# Altium PCB UC-425.PcbDoc (part 2 of 2)
Units mil, origin at the board's own origin, x right, y up, seen from the top; angles counter-clockwise.
Board outline 1574.8 x 1574.8 mil, 4 copper layers (Top Layer, MidLayer1, GND, Bottom Layer); 88 components, 85 nets, 465 pads, 244 vias.
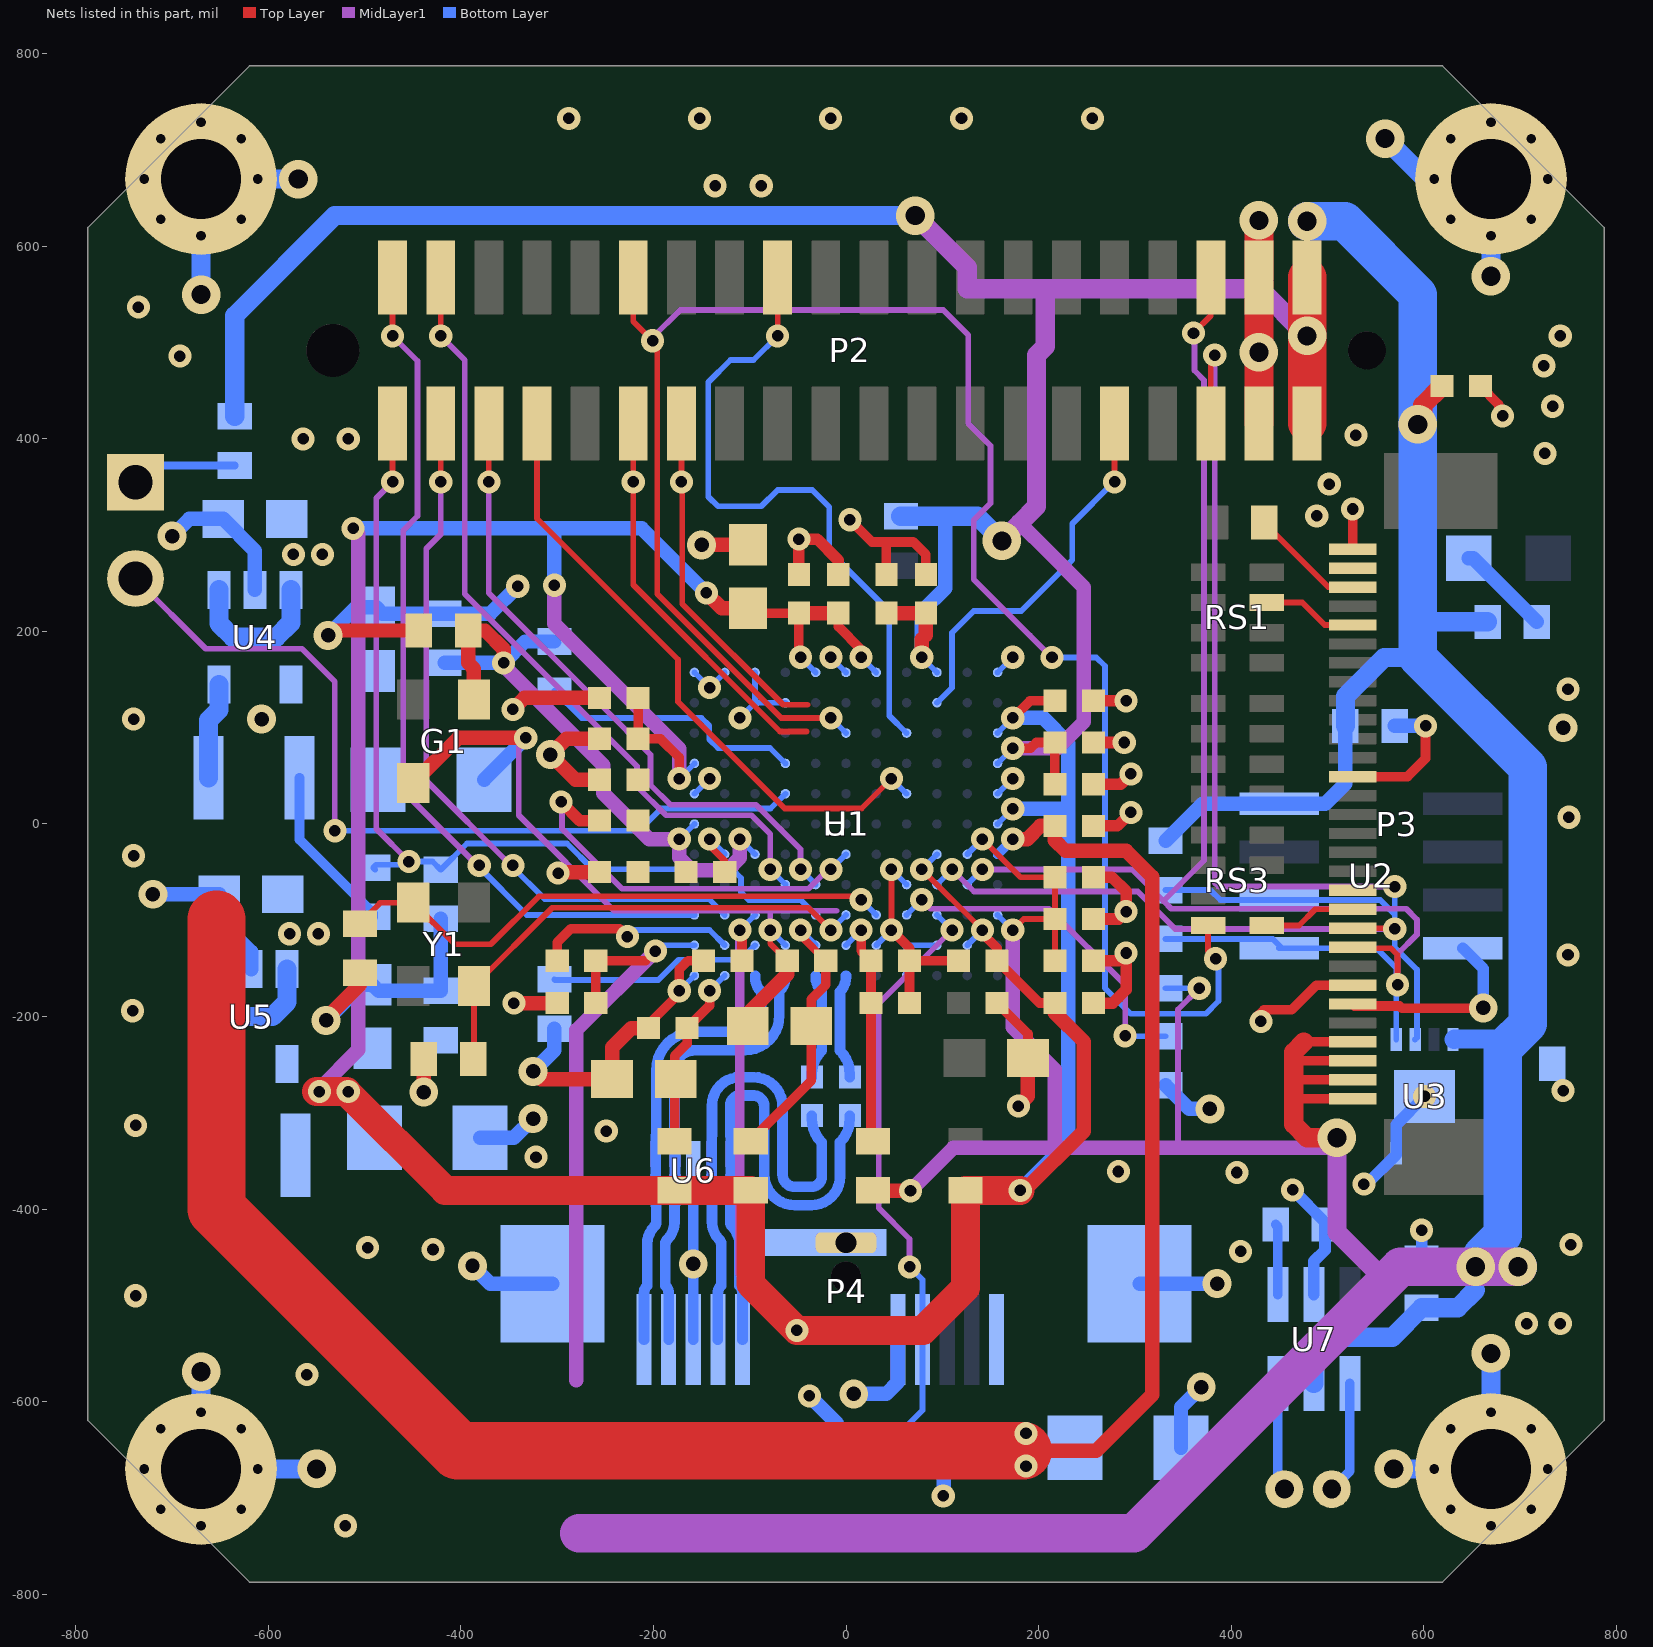
[diagram p4: the nets of this part, all layers, seen from the top]

## Via types
v1: diameter 24, hole 12, Top Layer to Bottom Layer, tented both sides, 207 vias
v2: diameter 40, hole 20, Top Layer to Bottom Layer, tented both sides, 18 vias
v3: diameter 30, hole 15, Top Layer to Bottom Layer, tented both sides, 18 vias
v4: diameter 24, hole 12, Top Layer to Bottom Layer, tented top, 1 vias

## Nets (pads, with @x,y where several pads share a name; then routed paths per layer and width w, separated by ;. In a path a pad name is that pad's centre, name@x,y a point inside that pad or via, vN(x,y) a via of type N, cw(c..) or ccw(c..) an arc to the next point about the centre after c; other vN are vias at no path point) (continued)
FX3_DQ13: P2.10 U1.K9 | length 396
  Top Layer w6: v1(279,355.43) P2.10@279,416.21
  Bottom Layer w6: U1.K9@94.47,125.96 110,141.49 110,198.56 132.64,221.2 182.09,221.2 235,274.11 235,312 278.43,355.43 v1(279,355.43)
FX3_DQ14: P2.23 U1.J8 | length 684
  Top Layer w6: v1(-71,507) P2.23@-71,567.79
  Bottom Layer w6: v1(-71,507) -96,482 -120,482 -143,459 -143,340 -133,330 -88,330 -71,347 -35,347 -17.37,329.37 -17.37,283.37 45,221 45,112.45 U1.J8@62.98,94.47
FX3_DQ15: P2.34 U1.G8 | length 656.1
  Top Layer w6: P2.34@-321,416.21 -321,355.43 -321,317.33 -174.56,170.89 -174.56,127 -63.56,16 16,16 v1(47.23,47.23) v1@44.03,47.23
  Bottom Layer w6: v1(47.23,47.23) U1.G8@62.98,31.49
FX3_I2S_SCL: P2.6 P3.21 R5.1 U1.D9 U2.6 U3.6 | length 1809.7
  Top Layer w6: P2.6@379,452 P2.6@379,416.21 379,483 v1(383,487) ; P3.21@526.23,-108.27 v1@569.27,-108.27
  MidLayer1 w6: v1(110.21,-47.24) 132.98,-70 303,-70 342,-109 v1(570,-109) ; v1(383,487) 383,-16 383,-61 387,-65 v1(570,-65)
  Bottom Layer w6: U1.D9@94.47,-62.98 v1(110.21,-47.24) ; R5.1@332,-68.59 375.59,-68.59 ; 379,-69 389,-79 U2.6@449.91,-79 555,-79 570,-94 ; v1(570,-65) 570,-94 ; U3.6@591.16,-223.94 593,-222.1 593,-151.23 570,-128.23 v1(570,-109) 570,-94
FX3_I2S_SDA: P2.5 P3.22 R4.1 U1.D10 U2.5 U3.5 | length 1686.9
  Top Layer w6: v1(361,510) 379,528 P2.5@379,567.79 P2.5@379,537 ; P3.22@526.23,-127.95 527.28,-129 566,-129 573,-136 v1(573,-167)
  MidLayer1 w6: v1(141.7,-47.24) 297.01,-47.24 329.89,-80.11 ; v1@362,509 362,471 372,461 372,-38 329.89,-80.11 ; v1(573,-167) 573,-135 593,-115 593,-99.23 581.91,-88.14 337.92,-88.14 329.89,-80.11
  Bottom Layer w6: U1.D10@125.96,-62.98 v1(141.7,-47.24) ; R4.1@332,-119.41 443.41,-119.41 U2.5@453,-129 ; U2.5@449.91,-129 U2.5@453,-129 ; U3.5@571.47,-223.94 v1@571.47,-168.53 ; v1@571.47,-167 571.47,-149.47 551,-129 U2.5@453,-129
FX3_PCLK: P2.29 RS3.4 U1.J6 | length 1999.2
  Top Layer w6: P2.29@-221,567.79 -221,522 v1(-200.96,501.96) ; v1@-196,497 -196,239 -67.22,110.21 v1(-15.75,110.21) ; v1@376.16,-132.16 RS3.4@376.16,-105.4
  MidLayer1 w6: v1(-200.96,501.96) -200.96,505.32 -172.28,534 78,534 ; 82,534 78,534 ; 191,195.7 142.85,243.85 ; v1(214,173) 213.7,173 142.85,243.85 ; 78,534 101,534 127,508 127,416 150,393 150,333.18 132.7,315.88 132.7,254 142.85,243.85
  Bottom Layer w6: v1(-15.75,110.21) U1.J6@0,94.47 ; v1(214,173) 260,173 269,164 269,-170.5 295.5,-197 374,-197 387,-184 387,-143 v1(384,-140)
FX3_RESET: C5.2 P2.40 R6.2 U1.C5 | length 995.6
  Top Layer w6: v1(-471,355.43) P2.40@-471,416.21
  MidLayer1 w6: v1(-471,355.43) -488,338.43 -488,-5 v1(-454,-39)
  Bottom Layer w6: R6.2@-489,-47.41 R6.2@-491,-45.41 -488,-42.41 -457.41,-42.41 v1(-454,-39) -429.41,-39 C5.2@-421,-47.41 -393.8,-20.21 -289.8,-20.21 -263,-47 -118,-47 -109,-56 -109,-71 -101,-79 -46.96,-79 U1.C5@-31.49,-94.47
FX3_SPI-MISO_UART-TX: P2.38 U1.C2 | length 745.2
  Top Layer w6: v1(-421,355.43) P2.38@-421,416.21
  MidLayer1 w6: v1(-421,355.43) -421,301 -436,286 -436,45 v1@-348.5,-42.5
  Bottom Layer w6: v1@-348.5,-42.5 -313,-78 -142.43,-78 U1.C2@-125.96,-94.47
  other v1: -346,-43
FX3_SPI-MOSI_UART-RX: P2.36 U1.D5 | length 671.9
  Top Layer w6: v1(-371,355.43) P2.36@-371,416.21
  MidLayer1 w6: v1(-371,355.43) -371,240 -253.5,122.5 -203,72 -203,40.56 -182.44,20 -93.56,20 -47.24,-26.32 v1(-47.24,-47.24)
  Bottom Layer w6: v1(-47.24,-47.24) U1.D5@-31.49,-62.98
FX3_SPI-SCK_UART-RTS: P2.37 U1.D4 | length 831.1
  Top Layer w6: v1(-421,507) P2.37@-421,567.79
  MidLayer1 w6: v1(-421,507) -396,482 -396,239 -217,60 -217,39 -187,9 -98.11,9 -78.73,-10.39 v1(-78.73,-47.24)
  Bottom Layer w6: v1(-78.73,-47.24) U1.D4@-62.98,-62.98
FX3_SPI-SSN_UART-CTS: P2.39 U1.C1 | length 927.5
  Top Layer w6: v1(-471,507) P2.39@-471,567.79
  MidLayer1 w6: v1(-471,507) -445,481 -445,320 -460,305 -460,265 ; -460,286 -460,265 ; v1@-382,-44 -460,34 -460,265
  Bottom Layer w6: v1@-382,-44 -331.53,-94.47 U1.C1@-157.45,-94.47
  other v1: -381,-43
GND: C1.1 C2.1 C3.2 C4.1 C5.1 C6.2 C7.1 C8.2 C9.2 C10.2 C11.1 C12.2 C13.1 C14.1 C15.2 C16.2 C17.2 C18.2 C19.2 C20.2 C21.1 C22.1 C23.1 C24.2 C25.2 C26.2 C27.2 C28.2 C29.2 C30.2 C31.2 C32.2 C33.2 C36.1 C37.2 C38.2 C39.2 C40.2 C41.2 C42.2 C43.2 C44.2 C45.2 C46.2 C47.2 C48.1 C49.1 CT1.2 CT2.2 CT3.2 G1.2 H1.0 P2.3 P2.4 P2.28 P2.30 P3.1 P3.13 P3.24 P3.25 P4.5 P4.8 P4.11 P4.12 P4.13 R7.2 R8.2 R9.2 U1.A1 U1.A8 U1.B2 U1.B4 U1.B7 U1.B8 U1.B9 U1.D8 U1.E2 U1.E6 U1.G1 U1.G11 U1.K3 U1.K4 U1.L1 U1.L2 U1.L3 U1.L6 U1.L11 U2.4 U3.4 U4.2 U5.2 U6.3 U6.8 U7.2 | length 7917.1
  Top Layer w6: P2.30@-221,416.21 v1(-221,355.43) -221,248.44 -68.56,96 -54,96 -41,96 ; v1(-171,355.43) P2.28@-171,416.21 ; -170,329 -170,318 ; v1@-170,354.43 -170,318 ; v1(-78.73,-110.22) -78.73,-124.28 C26.2@-61,-142 ; -40,123.81 -45,123.81 -65.26,123.81 -170,228.56 -170,318 ; v1(47.23,-110.22) v1(47.23,-47.24)
  Top Layer w7: v1(-141.71,-15.75) -141.71,-22.3 -126,-38 C31.2@-126,-50
  Top Layer w10: C18.2@-300,-142 -300,-123 -286,-109 -235.15,-109 v1(-227.15,-117) ; C25.2@-205,-212 -205,-208 -173.2,-176.2 v1(-173.2,-173.2) -173.2,-151.2 -164,-142 C40.2@-148,-142 ; v1(4,316) 27,293 36,293 42,293 ; C19.2@42,259 42,293 ; v1(47.23,-110.22) 66,-128.98 C10.2@66,-142 ; C9.2@66,-186 C10.2@66,-142 ; C32.2@83,259 83,280 70,293 42,293 ; C43.2@117,-142 C10.2@66,-142 ; C24.2@157,-186 189,-218 C21.1@189,-243 ; v1@426,-201 434,-193 463,-193 488.68,-167.32 P3.24@526.23,-167.32 ; P3.25@526.23,-187.01 528.22,-189 575,-189 577.55,-191.55 v3@657.45,-191.55 ; P3.13@526.23,49.21 583.21,49.21 602,68 v1(602,102) ; P3.1@526.23,285.43 v1(526.23,327.23) ; C20.2@659,455 678,436 v1@678,423
  Top Layer w12: v1(-296,23) -276.5,3.5 C15.2@-256,3.5 ; C37.2@-49,259 v1(-49,296) -30,296 -8,274 C41.2@-8,259 ; C44.2@257,-186 277,-186 291,-172 v1(291,-134) 283,-142 C42.2@257,-142 ; C16.2@257,-98.67 283.33,-98.67 v1(291,-91) 291,-70 276.33,-55.33 C27.2@257,-55.33 ; C47.2@257,-2 282,-2 v1(296,12) ; C29.2@257,41.33 285.33,41.33 v1(296,52) ; C17.2@257,84.67 v1(289,84.67) ; C38.2@257,128 v1(291,128)
  Top Layer w15: v3@-541,-203 -505,-167 C1.1@-505,-154.59 ; v3(-538,196) -533,201 C3.2@-443.59,201 ; G1.2@-449.5,42.69 -402.82,89.37 v1(-332.63,89.37) ; v3(-438.59,-278.59) C2.1@-438.59,-244 ; v1(-345,-186) C45.2@-300,-186 ; v1@-345,120 -334,131 C39.2@-256,131 ; v3(-325,-257) -317,-265 C22.1@-243,-265 ; v3@-308.5,73.5 v3(-307,72) ; -308,-265 C22.1@-243,-265 ; v1@-298,-50 C28.2@-256,-50 ; C30.2@-256,46 -281,46 v3(-307,72) ; C46.2@-256,88.5 -290.5,88.5 v3(-307,72) ; C25.2@-205,-212 -223,-212 -243,-232 C22.1@-243,-265 ; v3(-150,290) C36.1@-102,290 ; C23.1@-102,-210 -102,-197 -61,-156 C26.2@-61,-142 ; v1(179,-293) 189,-283 C21.1@189,-243
  Top Layer w30: P2.4@429,416.21 v2(429,490) P2.3@429,562 ; P2.3@429,567.79 v2(429,627)
  MidLayer1 w6: v1(-332.63,89.37) -340,82 -340,9 -241,-90 -78.73,-90 ; v1@-295,23 -295,-4.89 -232.65,-67.24 -38.95,-67.24 -18.95,-47.24 v1(-15.75,-47.24) ; v1(-78.73,-110.22) -78.73,-90 ; -10,-90 -78.73,-90
  Bottom Layer w6: v1@-220.15,-110 -141.92,-110 U1.B2@-125.96,-125.96 ; v1(-173.2,-173.2) U1.A1@-157.45,-157.45 ; U1.G1@-157.45,31.49 v1(-141.71,47.23) ; U1.L1@-157.45,157.45 v1(-141.71,141.7) U1.L2@-125.96,157.45 ; v1(-141.71,-15.75) U1.E2@-125.96,-31.49 ; v1(-110.22,110.21) U1.K3@-94.47,125.96 ; U1.L3@-94.47,157.45 U1.K3@-94.47,125.96 ; v1(-78.73,-110.22) U1.B4@-62.98,-125.96 ; U1.K4@-62.98,125.96 U1.K3@-94.47,125.96 ; v1(-15.75,-47.24) U1.E6@0,-31.49 ; v1(-15.75,173.19) U1.L6@0,157.45 ; U1.B7@31.49,-125.96 v1(47.23,-110.22) U1.B8@62.98,-125.96 ; v1(47.23,-47.24) U1.D8@62.98,-62.98 ; U1.A8@62.98,-157.45 U1.B8@62.98,-125.96 ; U1.B9@94.47,-125.96 U1.B8@62.98,-125.96 ; U1.G11@157.45,31.49 v1(173.19,47.23) ; U1.L11@157.45,157.45 v1(173.19,173.19)
  Bottom Layer w11: P4.8@-158.66,-535.55 -158.66,-463 U6.3@-158.66,-372.75
  Bottom Layer w12: v1(464,-380) 497.59,-413.59 C49.1@497.59,-416 497.59,-442.76 486,-454.35 U7.2@486,-488.74 ; v1@541,-374.02 571.47,-343.54 U3.4@571.47,-342.06 571.47,-312.53 v4(601,-283) ; C48.1@598,-451.41 v1(598,-422) ; U2.4@640.86,-129 662,-150.14 v3(662,-191) ; v3@657.45,-191.55 v3@657.45,-191
  Bottom Layer w15: v3(-720,-73) C13.1@-651,-73 -651,-99.68 -618,-132.68 U5.2@-618,-150.79 ; v3(-700,299) -682,317 C11.1@-647,317 -614,284 U4.2@-614,243.21 ; v3(-540,-204) -503,-167 C14.1@-492,-167 -485.59,-173.41 C12.2@-421,-173.41 C5.1@-421,-98.59 ; v3(-538,196) -509,225 C7.1@-488,225 -481.59,218.59 C8.2@-417,218.59 -369.41,218.59 v1(-341,247) ; v3(-388,-459) -369.52,-477.48 P4.12@-304.92,-477.48 ; CT3.2@-380,-326 -345,-326 v3(-325,-306) ; CT2.2@-376,46 v1(-332.63,89.37) ; v3(-325,-257) -303,-235 R9.2@-303,-212.59 ; v1(-38,-594) -9.59,-622.41 R7.2@-9.59,-647 ; v3(8,-592) 42,-592 53.94,-580.06 P4.5@53.94,-535.55 ; v1@101.41,-698 C33.2@101.41,-648 ; P4.11@304.92,-477.48 v3(385.52,-477.48) ; R8.2@332,-271.59 356.41,-296 v3(378,-296) ; CT1.2@348,-648 348,-606 v3(369,-585) ; C4.1@569.98,102 v1(602,102)
  Bottom Layer w20: v2(-670,-569) H1.0@-670,-670 v2(-550,-670) ; v2(-670,550) H1.0@-670,670 v2(-569,670) ; v2(560,712) 602,670 H1.0@670,670 v2(670,569) ; v2(569,-670) H1.0@670,-670 v2(670,-550)
  other v1: -520,-729 101,-698 -560,-572 707,-519 742,-519 -738,-490 410,-444 -429,-442 -497,-440 753,-437 538,-374.02 406,-362 283,-361 -322,-346 -249,-319 -738,-313 745,-277 431,-205 -741,-194 750,-136 -299,-51 -740,-33 751,7 -740,109 -346,119 750,140 489,320 502,353 726,385 -564,400 -517,400 529.7,403.97 682,424 734,434 725,476 -692,486 742,507 -735,537 -136,663 -88,663 -288,733 -152,733 -16,733 120,733 256,733
  other v3: -158.66,-457 745,100
LIV_IO: P3.5 RS1.7 | length 98.8
  Top Layer w6: RS1.7@437.16,230.1 473.9,230.1 497.31,206.69 P3.5@526.23,206.69
NetC9_1: C9.1 C10.1 L1.1 U1.B6 | length 246.5
  Top Layer w10: v1(15.74,-110.22) 15.74,-131.75 C10.1@26,-142 C9.1@26,-186 26,-327.41 L1.1@28,-329.41
  Bottom Layer w6: U1.B6@0,-125.96 v1(15.74,-110.22)
NetC49_2: C49.2 U7.1 | length 73.6
  Bottom Layer w10: C49.2@446.41,-416 448.6,-418.19 U7.1@448.6,-488.74
NetIR_1: IR.1 U7.4 | length 117.5
  Bottom Layer w10: IR.1@504.61,-691 523.4,-672.2 U7.4@523.4,-581.26
NetIR_2: IR.2 U7.6 | length 112.6
  Bottom Layer w10: U7.6@448.6,-581.26 448.6,-684.2 IR.2@455.39,-691
NetL2_1: L2.1 U4.5 | length 101.3
  Bottom Layer w20: L2.1@-662.24,48 -662.24,107.76 -651.4,118.6 U4.5@-651.4,144.79
NetL6_1: L6.1 U5.5 | length 99.3
  Bottom Layer w20: L6.1@-666.24,-344 -666.24,-286.24 -655.4,-275.4 U5.5@-655.4,-249.21
NetP1_1: P1.1 R1.1 | length 110.2
  Bottom Layer w8: P1.1@-738,355 -720.59,372.41 R1.1@-635,372.41
NetP1_2: P1.2 U1.G4 | length 890.3
  MidLayer1 w6: P1.2@-738,255 -665,182 -565,182 -531,148 v1(-531,-7)
  Bottom Layer w6: v1(-531,-7) -353,-7 -349,-7 -215,-7 -192,16 -78.47,16 U1.G4@-62.98,31.49
NetR2_1: R2.1 U1.H4 | length 279.5
  Bottom Layer w6: R2.1@-303,138.41 -274.59,110 -150,110 -142,102 -142,88 -133,79 -79,79 U1.H4@-62.98,62.98
NetR8_1: R8.1 U1.C8 | length 365.3
  MidLayer1 w6: v1(78.72,-78.73) 88,-88 211,-88 290,-167 v1(290,-220)
  Bottom Layer w6: U1.C8@62.98,-94.47 v1(78.72,-78.73) ; v1(290,-220) 290.41,-220.41 R8.1@332,-220.41
NetR9_1: R9.1 U1.B3 | length 223.7
  Bottom Layer w6: R9.1@-303,-161.41 -302.41,-162 -195,-162 -174,-141 -109.51,-141 U1.B3@-94.47,-125.96
NetR10_1: R10.1 V1.1 | length 98.3
  Bottom Layer w15: V1.1@646.66,276 651.59,276 R10.1@717.59,210
OTG_ID: P4.4 R7.1 U1.C9 | length 625.2
  MidLayer1 w6: v1(66,-460) 66,-431 34,-399 34,-186.43 v1(110.21,-110.22)
  Bottom Layer w6: R7.1@41.59,-647 79.53,-609.06 P4.4@79.53,-535.55 79.53,-473.53 v1(66,-460) ; U1.C9@94.47,-94.47 v1(110.21,-110.22)
PCK_IO: P3.20 RS3.5 | length 96
  Top Layer w6: RS3.5@437.16,-105.4 470.6,-105.4 487.42,-88.58 P3.20@526.23,-88.58
RXVDDQ: C22.2 C25.1 L4.2 U1.A2 | length 193.5
  Top Layer w10: L4.2@-178,-329.41 -178,-241 -165,-228 C25.1@-165,-212 -141.71,-188.71 v1(-141.71,-173.2)
  Bottom Layer w6: v1(-141.71,-173.2) U1.A2@-125.96,-157.45
SSRX_N: P4.9 U1.A4 U6.4 U6.7 | length 467.8
  Bottom Layer w11: P4.9@-184.25,-535.55 -184.25,-487.47 ccw(c-195.5,-487.47) -187.55,-479.51 -187.55,-436.22 cw(c-180.78,-436.22) -185.56,-431.43 ccw(c-203.44,-413.56) -178.16,-413.56 -178.16,-396.5 ccw(c-179.37,-395.29) -177.66,-395.29 U6.4@-177.66,-377 U6.7@-177.66,-343 -177.66,-324.71 ccw(c-179.37,-324.71) -178.16,-323.5 -178.16,-256.16 cw(c-157,-256.16) -157,-235 -105.23,-235 ccw(c-105.23,-199) -69.23,-199 -69.23,-174.12 ccw(c-84.3,-159.04) -62.98,-159.04 U1.A4@-62.98,-157.45
SSRX_P: P4.10 U1.A3 U6.5 U6.6 | length 467.8
  Bottom Layer w11: P4.10@-209.84,-535.55 -209.84,-487.47 cw(c-198.59,-487.47) -206.55,-479.51 -206.55,-436.22 cw(c-180.78,-436.22) -199,-418 ccw(c-203.44,-413.56) -197.16,-413.56 -197.16,-396.5 cw(c-195.95,-395.29) -197.66,-395.29 U6.5@-197.66,-377 U6.6@-197.66,-343 -197.66,-324.71 cw(c-195.95,-324.71) -197.16,-323.5 -197.16,-256.16 cw(c-157,-256.16) -157,-216 -105.23,-216 ccw(c-105.23,-199) -88.23,-199 -88.23,-174.12 cw(c-73.15,-159.04) -94.47,-159.04 U1.A3@-94.47,-157.45
SST_N: C35.2 U1.A6 | length 110
  Bottom Layer w11: U1.A6@0,-157.45 0,-159.04 cw(c-21.32,-159.04) -6.25,-174.12 -6.25,-235.26 cw(c-30.98,-259.99) 4,-259.99 C35.2@4,-263
SST_P: C34.2 U1.A5 | length 110
  Bottom Layer w11: C34.2@-35.49,-263 -35.49,-259.99 cw(c-0.51,-259.99) -25.25,-235.25 -25.25,-174.12 cw(c-10.17,-159.04) -31.49,-159.04 U1.A5@-31.49,-157.45
SSTX_N: C35.1 P4.6 U6.1 U6.10 | length 545.3
  Bottom Layer w11: P4.6@-107.48,-535.55 -107.48,-487.47 ccw(c-118.73,-487.47) -110.78,-479.51 -110.78,-436.22 ccw(c-136.54,-436.22) -118.32,-418 cw(c-113.88,-413.56) -120.16,-413.56 -120.16,-396.5 ccw(c-121.37,-395.29) -119.66,-395.29 U6.1@-119.66,-377 U6.10@-119.66,-343 -119.66,-324.71 ccw(c-121.37,-324.71) -120.16,-323.5 -120.16,-292.16 cw(c-110,-292.16) -110,-282 -96,-282 cw(c-96,-293) -85,-293 -85,-364 ccw(c-53,-364) -53,-396 -36,-396 ccw(c-36,-366.25) -6.25,-366.25 -6.25,-330.75 ccw(c-30.98,-306.01) 4,-306.01 C35.1@4,-303
SSTX_P: C34.1 P4.7 U6.2 U6.9 | length 545.3
  Bottom Layer w11: P4.7@-133.07,-535.55 -133.07,-487.47 cw(c-121.82,-487.47) -129.78,-479.51 -129.78,-436.22 ccw(c-136.54,-436.22) -131.76,-431.43 cw(c-113.88,-413.56) -139.16,-413.56 -139.16,-396.5 cw(c-137.95,-395.29) -139.66,-395.29 U6.2@-139.66,-377 U6.9@-139.66,-343 -139.66,-324.71 cw(c-137.95,-324.71) -139.16,-323.5 -139.16,-292.16 cw(c-110,-292.16) -110,-263 -96,-263 cw(c-96,-293) -66,-293 -66,-364 ccw(c-53,-364) -53,-377 -36,-377 ccw(c-36,-366.25) -25.25,-366.25 -25.25,-330.75 cw(c-0.51,-306.01) -35.49,-306.01 C34.1@-35.49,-303
STB_IO: P3.2
TIGG_IO: P3.3 R11.1 | length 119.7
  Top Layer w6: R11.1@434.59,313 434.59,312.41 500.94,246.06 P3.3@526.23,246.06
TXVDDQ: C23.2 C26.1 L5.2 U1.B5 | length 284.6
  Top Layer w6: v1@-47.24,-115.77 v1(-47.24,-110.22)
  Top Layer w8: v1@-47.24,-115.77 C26.1@-21,-142
  Top Layer w10: L5.2@-99,-329.41 -36,-266.41 C23.2@-36,-210 -36,-182 -21,-167 C26.1@-21,-142
  Bottom Layer w6: v1(-47.24,-110.22) U1.B5@-31.49,-125.96
VCC(+3.3V): C3.1 C4.2 C6.1 C7.2 C8.1 C15.1 C16.1 C17.1 C18.1 C19.1 C20.1 C27.1 C28.1 C29.1 C30.1 C31.1 C32.1 C42.1 C45.1 C48.2 CT2.1 G1.4 L1.2 L2.2 P2.1 P2.2 P3.27 P3.28 P3.29 P3.30 R1.2 R2.2 R3.1 R4.2 R5.2 R6.1 R10.2 U1.B1 U1.C11 U1.E3 U1.E10 U1.F1 U1.H11 U1.L9 U2.8 U3.8 U4.4 U7.5 | length 8903.5
  Top Layer w6: v1(141.7,-15.75) 181.29,-55.33 C27.1@217,-55.33 C16.1@217,-98.67 ; v1(173.19,-110.22) 184.74,-98.67 C16.1@217,-98.67 ; C17.1@212.94,88.72 C17.1@217,84.67 ; C42.1@217,-142 C16.1@217,-98.67
  Top Layer w10: C45.1@-260,-186 C18.1@-260,-142 -208,-142 ; v1(173.19,78.72) 191.72,78.72 197.67,84.67 C17.1@217,84.67 C29.1@217,41.33 ; 465,-285.43 P3.30@526.23,-285.43 ; 465,-265.75 P3.29@526.23,-265.75 ; 465,-246.06 P3.28@526.23,-246.06 ; 482,-226.38 P3.27@526.23,-226.38
  Top Layer w15: G1.4@-386.5,129.31 -386.5,161.32 -392.59,167.41 -392.41,167.59 C3.1@-392.41,201 -375,201 -355.59,181.59 v1(-355.59,167.41) ; L1.2@28,-380.59 28.41,-381 v1(67,-381) ; C19.1@42,219 C32.1@83,219 83,196 ; v1(78.72,173.19) 78.72,191.72
  Top Layer w20: 475.62,-226.38 465,-237 465,-246.06 465,-265.75 465,-285.43 465,-312 479,-326 v2(510,-326) ; v2@594,412 597,412 599,414 599,435 C20.1@619,455
  Top Layer w40: P2.2@479,416.21 v2(479,507) P2.1@479,567.79
  MidLayer1 w6: 345,-336.5 345,-192.59 v1(367,-170.59) v1@363.91,-170.59
  MidLayer1 w15: v1@-357,166 -252,61 -252,32 -204.26,-15.75 v1(-173.2,-15.75) -173.2,-34.81 -160,-48 -123,-48 -110.22,-35.22 v1(-110.22,-15.75) ; -280,-578 -280,-214 v1(-198,-132) ; v1(67,-381) 111.5,-336.5 217,-336.5 ; v1(173.19,-110.22) 173.19,-211.2 217,-255 217,-336.5 ; v1(173.19,78.72) 219.72,78.72 247,106 247,246 211.5,281.5 180.5,312.5 ; v2(510,-326) 499.5,-336.5 345,-336.5 217,-336.5
  MidLayer1 w20: v2(72,632) 126,578 126,556 207,556 ; v2(162,294) 180.5,312.5 198,330 198,487 207,496 207,556 ; v2(479,507) 430,556 207,556 ; v2(510,-326) 510,-424.13 560.93,-475.07
  MidLayer1 w40: -277,-737 299,-737 560.93,-475.07 576,-460 v2@652,-460 ; v2@660,-460 v2(698,-460)
  Bottom Layer w6: v1@-191.96,-125.96 U1.B1@-157.45,-125.96 ; v1(-173.2,-15.75) U1.F1@-157.45,0 ; v1(-110.22,-15.75) U1.E3@-94.47,-31.49 ; v1(78.72,173.19) U1.L9@94.47,157.45 ; U1.E10@125.96,-31.49 v1(141.7,-15.75) ; U1.C11@157.45,-94.47 v1(173.19,-110.22) ; U1.H11@157.45,62.98 v1(173.19,78.72) ; R4.2@332,-170.59 v1(367,-170.59)
  Bottom Layer w10: L2.2@-567.76,48 -567.76,-16.24 -491,-93 R6.1@-491,-96.59
  Bottom Layer w15: C8.1@-417,167.41 v1(-355.59,167.41) -333.41,189.59 R2.2@-303,189.59 ; v1(78.72,173.19) 78.72,220.72 103,245 103,319.59 ; R5.2@332,-17.41 370.41,21 U2.8@449.91,21 498,21 518.8,41.8 C4.2@518.8,102
  Bottom Layer w20: R1.2@-635,423.59 -635,528 -531,632 v2(72,632) ; R3.1@57,319.59 103,319.59 136.41,319.59 v2(162,294) ; U7.5@486,-581.26 486,-547 499.97,-533.03 567.56,-533.03 C48.2@598,-502.59 635.41,-502.59 654,-484 ; C4.2@518.8,102 518.8,132.8 559,173 594,173 ; 595,210 R10.2@666.41,210 ; U3.8@631.75,-223.94 632.28,-223.41 672,-223.41
  Bottom Layer w40: v2(479,626) 518,626 594,550 594,412 594,173 708,59 708,-207.74 682.41,-233.33 C6.1@682.41,-249 682.41,-426.59 v2@661,-448
  other v2: 654,-460 594,415
  other v3: -607,109
VCC(+5V): C11.2 C13.2 C33.1 C47.1 CT1.1 P4.1 U1.E11 U4.1 U4.3 U5.1 U5.3 | length 2435.6
  Top Layer w6: C47.1@213.26,-5.75 C47.1@217,-2
  Top Layer w15: v1(173.19,-15.75) 188.25,-15.75 202,-2 C47.1@217,-2 217,-17 228,-28 291,-28 318,-55 318,-593 260,-651 208,-651
  Top Layer w60: -654,-99 -654,-400 -403,-651 184,-651
  Bottom Layer w10: U1.E11@157.45,-31.49 v1(173.19,-15.75)
  Bottom Layer w20: U5.1@-655.4,-150.79 -655.4,-185.6 -641,-200 -595.78,-200 -580.6,-184.82 U5.3@-580.6,-150.79 ; U4.1@-651.4,243.21 -651.4,208.4 -637,194 -591.78,194 -576.6,209.18 U4.3@-576.6,243.21
  other v1: 187,-667 187,-633 -578,-114 -548,-114 -574,280 -544,280
VDD(+1.2V): C12.1 C14.2 C36.2 C37.1 C38.1 C39.1 C40.1 C41.1 C43.1 C44.1 C46.1 CT3.1 L3.1 L4.1 L5.1 L6.2 U1.B10 U1.C3 U1.E9 U1.F11 U1.H1 U1.J11 U1.L5 U1.L7 U5.4 | length 4475.1
  Top Layer w6: v1(78.72,-47.24) v1(141.7,-110.22) v1@137,-105.51 ; C38.1@209.22,120.21 C38.1@217,128
  Top Layer w10: C39.1@-216,131 C46.1@-216,88.5 -192.5,88.5 -173.2,69.19 v1(-173.2,47.23) ; C40.1@-108,-142 v1@-108,-112.43 ; C36.2@-102,224 -97,219 C37.1@-49,219 -49,174.96 v1(-47.24,173.19) ; C41.1@-8,219 -8,205 15.74,181.25 v1(15.74,173.19) ; v1@139.96,-111.96 157,-129 C43.1@157,-142 201,-186 C44.1@217,-186 ; v1(173.19,110.21) 190.98,128 C38.1@217,128
  Top Layer w15: v1(-145,240) -129,224 C36.2@-102,224 ; C37.1@-49,219 C41.1@-8,219 ; v1(181,-380.59) 185.41,-380.59 247,-319 247,-226 217,-196 C44.1@217,-186
  Top Layer w30: v1@-550,-278 v1(-547,-278) -519,-278 -416.41,-380.59 L4.1@-178,-380.59 L5.1@-99,-380.59 -99,-478 v1(-51,-526) 55,-526 80,-526 124,-482 L3.1@124,-380.59 v1(181,-380.59)
  MidLayer1 w10: v1(-110.22,-110.22) -110.22,-466.79 v1(-51,-526)
  MidLayer1 w15: v1@-550,-278 -537.5,-265.5 ; -517,-245 -537.5,-265.5 ; v1(-512,307) -506.5,301.5 -506.5,-234.5 -537.5,-265.5 ; v1(-303,248) -303,208 -173.2,78.19 v1(-173.2,47.23)
  Bottom Layer w6: v1(-173.2,47.23) U1.H1@-157.45,62.98 ; v1(-110.22,-110.22) U1.C3@-94.47,-94.47 ; v1(-47.24,173.19) U1.L5@-31.49,157.45 ; v1(15.74,173.19) U1.L7@31.49,157.45 ; v1(78.72,-47.24) U1.E9@94.47,-31.49 ; U1.B10@125.96,-125.96 v1(141.7,-110.22) ; U1.F11@157.45,0 v1(173.19,15.74) ; U1.J11@157.45,94.47 v1(173.19,110.21)
  Bottom Layer w15: v1(-512,307) -303,307 ; v1@-303,256 -303,307 ; v1(-145,240) -212,307 -303,307 ; v1(173.19,15.74) 228,15.74 ; v1(173.19,110.21) 204.78,110.21 231,84 231,-330.59 v1(181,-380.59)
  other v1: -517,-278
XCK_IO: P3.19
XTAL_IN: C2.2 U1.C6 Y1.1 | length 512.4
  Top Layer w6: C2.2@-387.41,-244 -386.5,-243.09 Y1.1@-386.5,-168.31 -305.2,-87 -38.96,-87 v1(-15.75,-110.22)
  Bottom Layer w6: v1(-15.75,-110.22) U1.C6@0,-94.47
XTAL_OUT: C1.2 U1.C7 Y1.2 | length 592.6
  Top Layer w6: C1.2@-505,-103.41 -484,-82.41 -484,-81.69 Y1.2@-449.5,-81.69 -406.19,-125 -369,-125 -319,-75 12.02,-75 v1(15.74,-78.73)
  Bottom Layer w6: v1(15.74,-78.73) U1.C7@31.49,-94.47
pads on no net: G1.1 P2.0 P3.31 P4.14 RS3.3 RS3.6 U1.A11 U1.B11 U1.C4 U1.C10 U1.D1 U1.D2 U1.D3 U1.D7 U1.D11 U1.E1 U1.E4 U1.E5 U1.E7 U1.E8 U1.F2 U1.F3 U1.F4 U1.F5 U1.F6 U1.G2 U1.G3 U1.H2 U1.H3 U1.H6 U1.J1 U1.J2 U1.J3 U1.J4 U1.K1 U1.K2 U1.K5 U1.L4 U2.1 U2.2 U2.3 U2.7 U3.1 U3.2 U3.3 U3.7 U7.3 Y1.3 Y1.4

## Polygon pours and split planes (outlines as drawn)
GND on Bottom Layer "GND_L02_P1001" (solid, remove dead copper, shelved, pour order 1005): -790.83,-649.85 cw(c-788,-647) -792.02,-647 -792.02,647 cw(c-788,647) -790.83,649.85 -790.84,649.84 -650.44,790.24 -650.45,790.23 cw(c-647.6,787.4) -647.6,791.42 647.6,791.42 cw(c647.6,787.4) 650.45,790.23 650.44,790.24 790.24,650.44 790.23,650.45 cw(c787.4,647.6) 791.42,647.6 791.42,-647.6 cw(c787.4,-647.6) 790.23,-650.45 790.24,-650.44 650.44,-790.24 650.45,-790.23 cw(c647.6,-787.4) 647.6,-791.42 -647.6,-791.42 cw(c-647.6,-787.4) -650.45,-790.23 -650.44,-790.24
GND on Top Layer "GND_L02_P1001" (solid, remove dead copper, shelved, pour order 1004): -790.83,-649.85 cw(c-788,-647) -792.02,-647 -792.02,647 cw(c-788,647) -790.83,649.85 -790.84,649.84 -650.44,790.24 -650.45,790.23 cw(c-647.6,787.4) -647.6,791.42 647.6,791.42 cw(c647.6,787.4) 650.45,790.23 650.44,790.24 790.24,650.44 790.23,650.45 cw(c787.4,647.6) 791.42,647.6 791.42,-647.6 cw(c787.4,-647.6) 790.23,-650.45 790.24,-650.44 650.44,-790.24 650.45,-790.23 cw(c647.6,-787.4) 647.6,-791.42 -647.6,-791.42 cw(c-647.6,-787.4) -650.45,-790.23 -650.44,-790.24
GND on MidLayer1 "GND_L02_P1001" (solid, remove dead copper, shelved, pour order 1003): -790.83,-649.85 cw(c-788,-647) -792.02,-647 -792.02,647 cw(c-788,647) -790.83,649.85 -790.84,649.84 -650.44,790.24 -650.45,790.23 cw(c-647.6,787.4) -647.6,791.42 647.6,791.42 cw(c647.6,787.4) 650.45,790.23 650.44,790.24 790.24,650.44 790.23,650.45 cw(c787.4,647.6) 791.42,647.6 791.42,-647.6 cw(c787.4,-647.6) 790.23,-650.45 790.24,-650.44 650.44,-790.24 650.45,-790.23 cw(c647.6,-787.4) 647.6,-791.42 -647.6,-791.42 cw(c-647.6,-787.4) -650.45,-790.23 -650.44,-790.24
GND on GND (split plane): 643.67,735 604,735 604,604 735,604 735,643.67 767.3,611.36 767.3,-611.36 735,-643.67 735,-605 604,-605 604,-736 642.67,-736 611.36,-767.3 -611.36,-767.3 -642.67,-736 -605,-736 -605,-605 -736,-605 -736,-642.67 -767.3,-611.36 -767.3,611.36 -736,642.67 -736,604 -605,604 -605,735 -643.67,735 -611.36,767.3 611.36,767.3

## Keep-outs
Keep-Out Layer:
  the board outline again, w8

## Other copper
Top Layer:
  rectangle net VCC(+5V): -678,-137 -627,299
  rectangle net VCC(+5V): -678,258 -530,303
  rectangle net VCC(+5V): -685,-137 -538,-82
  rectangle net VCC(+3.3V): -223,-61 -163,12
  rectangle net VCC(+3.3V): -226,-55 -207,53
  pour cut-out: -62,-238 -62,-327.41 26,-327.41 26,-238
  pour cut-out: 554,-158 555,-159 555,-196 497,-196 496,-197 491.63,-192.63 491.63,-160.89 551.11,-160.89
MidLayer1:
  rectangle net VCC(+3.3V): -681,93 -543.13,138
  rectangle net VCC(+3.3V): -684.87,-528 -635.87,138
  rectangle net VCC(+3.3V): -488,-757 -253,-496
  rectangle net VCC(+3.3V): -685,-534 -258,-496
  pour cut-out: -62,-238 -62,-327.41 26,-327.41 26,-238
Bottom Layer:
  rectangle net VCC(+3.3V): -615,17 -472,170
  rectangle net VCC(+5V): -596,-180 -537,-91
  rectangle net VCC(+5V): -607,-126 -552,-51
  rectangle net VDD(+1.2V): -500,-236 -405,-213
  rectangle net VCC(+3.3V): -496,156 -401,179
  rectangle net VCC(+5V): -588,226 -530,336
  rectangle net VDD(+1.2V): -584,-377 -473,-230
  rectangle net VCC(+5V): 151,-681 245,-618
  rectangle net VCC(+5V): 150,-665 172,-490
  rectangle net VCC(+3.3V): 630,-483 723,-414
  pour cut-out: -62,-238 -62,-327.41 26,-327.41 26,-238
GND (plane layer: these items are gaps in the copper):
  region: 735,-605 604,-605 604,-736 735,-736
  region: 735,735 604,735 604,604 735,604
  region: -605,735 -736,735 -736,604 -605,604
  region: -605,-605 -736,-605 -736,-736 -605,-736
  rectangle: -62,-327.41 26,-238
  lines w15: -645.67,-787.4 645.67,-787.4

## Silkscreen, mask and mechanical layers (free items; w line width, h text height)
Top Overlay:
  lines w8: 184,-211 185,-210 185,-195 ; 196,-189 190,-195 185,-195 ; 282,-251 241,-251 185,-195
Bottom Overlay:
  text "®" at -380,695 h100
  text "Arducam" at 383.46,610 h200
  text "UC-425" at 173,494 h120
  text "Rev.C" at 129,387 h120
Mechanical 1:
  the board outline again, w8
Mechanical 2:
  circle w7.78: c-1.24,-455 r31.24
  text "这是孔，不是MASK点" at -179,-546 h55

## Text inside footprints (layer, text, board x,y; h text height)
P3: Top Overlay "30" at 485.67,-329.65 h60 r90; Top Overlay "1" at 488,344 h60 r90
P4: Mechanical 16 "1" at 150.86,-405.96 h55; Mechanical 16 "6" at -112.92,-405.96 h55; Mechanical 16 "9" at -189.69,-405.96 h55; Mechanical 16 "2" at 125.27,-405.96 h55; Mechanical 16 "3" at 99.68,-405.96 h55; Mechanical 16 "4" at 74.09,-405.96 h55; Mechanical 16 "7" at -138.51,-405.96 h55; Mechanical 16 "5" at 48.5,-405.96 h55; Mechanical 16 "8" at -164.1,-405.96 h55; Mechanical 16 "10" at -215.28,-395.96 h55
U1: Bottom Overlay "L" at -234.8,150.6 h55 r270; Bottom Overlay "A" at -230,-155 h55 r270; Bottom Overlay "11" at 205,-210 h55 r270; Bottom Overlay "1" at -185.2,-232.5 h55 r270; Mechanical 15 "A" at -230,-160 h55 r180; Mechanical 15 "L" at -229,175 h55 r180; Mechanical 15 "11" at 150,-210 h55 r180; Mechanical 15 "1" at -165,-215 h55 r180; Mechanical 16 "E10" at 125.96,-65.09 h55 r180; Mechanical 16 "D11" at 157.45,-96.58 h55 r180; Mechanical 16 "A11" at 157.45,-191.05 h55 r180; Mechanical 16 "C9" at 94.47,-116.87 h55 r180; Mechanical 16 "F2" at -125.96,-22.4 h55 r180; Mechanical 16 "E3" at -94.47,-53.89 h55 r180; Mechanical 16 "F1" at -157.45,-22.4 h55 r180; Mechanical 16 "L9" at 94.47,135.05 h55 r180; Mechanical 16 "H11" at 157.45,29.38 h55 r180; Mechanical 16 "J4" at -62.98,72.07 h55 r180; Mechanical 16 "F4" at -62.98,-22.4 h55 r180; Mechanical 16 "J3" at -94.47,72.07 h55 r180; Mechanical 16 "J1" at -157.45,72.07 h55 r180; Mechanical 16 "E4" at -62.98,-53.89 h55 r180; Mechanical 16 "E5" at -31.49,-53.89 h55 r180; Mechanical 16 "G2" at -125.96,9.09 h55 r180; Mechanical 16 "F5" at -31.49,-22.4 h55 r180; Mechanical 16 "K2" at -125.96,103.56 h55 r180; Mechanical 16 "E1" at -157.45,-53.89 h55 r180; Mechanical 16 "G8" at 62.98,9.09 h55 r180; Mechanical 16 "L10" at 125.96,123.85 h55 r180; Mechanical 16 "F8" at 62.98,-22.4 h55 r180; Mechanical 16 "F3" at -94.47,-22.4 h55 r180; Mechanical 16 "K1" at -157.45,103.56 h55 r180; Mechanical 16 "J10" at 125.96,60.87 h55 r180; Mechanical 16 "G6" at 0,9.09 h55 r180; Mechanical 16 "K6" at 0,103.56 h55 r180; Mechanical 16 "K9" at 94.47,103.56 h55 r180; Mechanical 16 "J9" at 94.47,72.07 h55 r180; Mechanical 16 "F10" at 125.96,-33.6 h55 r180; Mechanical 16 "H9" at 94.47,40.58 h55 r180; Mechanical 16 "J5" at -31.49,72.07 h55 r180; Mechanical 16 "G9" at 94.47,9.09 h55 r180; Mechanical 16 "K11" at 157.45,92.36 h55 r180; Mechanical 16 "G10" at 125.96,-2.11 h55 r180; Mechanical 16 "H10" at 125.96,29.38 h55 r180; Mechanical 16 "J8" at 62.98,72.07 h55 r180; Mechanical 16 "K10" at 125.96,92.36 h55 r180; Mechanical 16 "F7" at 31.49,-22.4 h55 r180; Mechanical 16 "G5" at -31.49,9.09 h55 r180; Mechanical 16 "K5" at -31.49,103.56 h55 r180; Mechanical 16 "H8" at 62.98,40.58 h55 r180; Mechanical 16 "H6" at 0,40.58 h55 r180; Mechanical 16 "H5" at -31.49,40.58 h55 r180; Mechanical 16 "F9" at 94.47,-22.4 h55 r180; Mechanical 16 "H3" at -94.47,40.58 h55 r180; Mechanical 16 "G3" at -94.47,9.09 h55 r180; Mechanical 16 "H2" at -125.96,40.58 h55 r180; Mechanical 16 "J2" at -125.96,72.07 h55 r180; Mechanical 16 "B11" at 157.45,-159.56 h55 r180; Mechanical 16 "E8" at 62.98,-53.89 h55 r180; Mechanical 16 "C10" at 125.96,-128.07 h55 r180; Mechanical 16 "E7" at 31.49,-53.89 h55 r180; Mechanical 16 "F6" at 0,-22.4 h55 r180; Mechanical 16 "B6" at 0,-148.36 h55 r180; Mechanical 16 "D2" at -125.96,-85.38 h55 r180; Mechanical 16 "C4" at -62.98,-116.87 h55 r180; Mechanical 16 "C5" at -31.49,-116.87 h55 r180; Mechanical 16 "D1" at -157.45,-85.38 h55 r180; Mechanical 16 "D4" at -62.98,-85.38 h55 r180; Mechanical 16 "K8" at 62.98,103.56 h55 r180; Mechanical 16 "J6" at 0,72.07 h55 r180; Mechanical 16 "J7" at 31.49,72.07 h55 r180; Mechanical 16 "C8" at 62.98,-116.87 h55 r180; Mechanical 16 "B3" at -94.47,-148.36 h55 r180; Mechanical 16 "H7" at 31.49,40.58 h55 r180; Mechanical 16 "A5" at -31.49,-179.85 h55 r180; Mechanical 16 "G7" at 31.49,9.09 h55 r180; Mechanical 16 "A6" at 0,-179.85 h55 r180; Mechanical 16 "K7" at 31.49,103.56 h55 r180; Mechanical 16 "C2" at -125.96,-116.87 h55 r180; Mechanical 16 "D3" at -94.47,-85.38 h55 r180; Mechanical 16 "D5" at -31.49,-85.38 h55 r180; Mechanical 16 "D7" at 31.49,-85.38 h55 r180; Mechanical 16 "D6" at 0,-85.38 h55 r180; Mechanical 16 "C1" at -157.45,-116.87 h55 r180; Mechanical 16 "E9" at 94.47,-53.89 h55 r180; Mechanical 16 "B10" at 125.96,-159.56 h55 r180; Mechanical 16 "L7" at 31.49,135.05 h55 r180; Mechanical 16 "L5" at -31.49,135.05 h55 r180; Mechanical 16 "H1" at -157.45,40.58 h55 r180; Mechanical 16 "C3" at -94.47,-116.87 h55 r180; Mechanical 16 "J11" at 157.45,60.87 h55 r180; Mechanical 16 "F11" at 157.45,-33.6 h55 r180; Mechanical 16 "D9" at 94.47,-85.38 h55 r180; Mechanical 16 "D10" at 125.96,-96.58 h55 r180; Mechanical 16 "A4" at -62.98,-179.85 h55 r180; Mechanical 16 "E11" at 157.45,-65.09 h55 r180; Mechanical 16 "A7" at 31.49,-179.85 h55 r180; Mechanical 16 "A10" at 125.96,-191.05 h55 r180; Mechanical 16 "A9" at 94.47,-179.85 h55 r180; Mechanical 16 "A3" at -94.47,-179.85 h55 r180; Mechanical 16 "G4" at -62.98,9.09 h55 r180; Mechanical 16 "H4" at -62.98,40.58 h55 r180; Mechanical 16 "L8" at 62.98,135.05 h55 r180; Mechanical 16 "L4" at -62.98,135.05 h55 r180; Mechanical 16 "C7" at 31.49,-116.87 h55 r180; Mechanical 16 "B2" at -125.96,-148.36 h55 r180; Mechanical 16 "B4" at -62.98,-148.36 h55 r180; Mechanical 16 "E6" at 0,-53.89 h55 r180; Mechanical 16 "C6" at 0,-116.87 h55 r180; Mechanical 16 "B1" at -157.45,-148.36 h55 r180; Mechanical 16 "C11" at 157.45,-128.07 h55 r180; Mechanical 16 "A2" at -125.96,-179.85 h55 r180; Mechanical 16 "B5" at -31.49,-148.36 h55 r180; Mechanical 16 "L6" at 0,135.05 h55 r180; Mechanical 16 "A1" at -157.45,-179.85 h55 r180; Mechanical 16 "E2" at -125.96,-53.89 h55 r180; Mechanical 16 "L2" at -125.96,135.05 h55 r180; Mechanical 16 "L1" at -157.45,135.05 h55 r180; Mechanical 16 "K3" at -94.47,103.56 h55 r180; Mechanical 16 "G1" at -157.45,9.09 h55 r180; Mechanical 16 "K4" at -62.98,103.56 h55 r180; Mechanical 16 "L3" at -94.47,135.05 h55 r180; Mechanical 16 "A8" at 62.98,-179.85 h55 r180; Mechanical 16 "B8" at 62.98,-148.36 h55 r180; Mechanical 16 "B9" at 94.47,-148.36 h55 r180; Mechanical 16 "D8" at 62.98,-85.38 h55 r180; Mechanical 16 "B7" at 31.49,-148.36 h55 r180; Mechanical 16 "L11" at 157.45,123.85 h55 r180; Mechanical 16 "G11" at 157.45,-2.11 h55 r180
U6: Mechanical 16 "10" at -119.66,-303 h55; Mechanical 16 "1" at -119.66,-357 h55; Mechanical 16 "7" at -177.66,-323 h55; Mechanical 16 "4" at -177.66,-357 h55; Mechanical 16 "6" at -197.66,-323 h55; Mechanical 16 "5" at -197.66,-357 h55; Mechanical 16 "2" at -139.66,-357 h55; Mechanical 16 "9" at -139.66,-323 h55; Mechanical 16 "8" at -158.66,-327.25 h55; Mechanical 16 "3" at -158.66,-352.75 h55